# Altium PCB beta0303initial.PcbDoc (part 2 of 2)
Units mm, origin at the board's own origin, x right, y up, seen from the top; angles counter-clockwise.
Board outline 100 x 100 mm, 2 copper layers (Top Layer, Bottom Layer); 188 components, 107 nets, 516 pads, 164 vias.
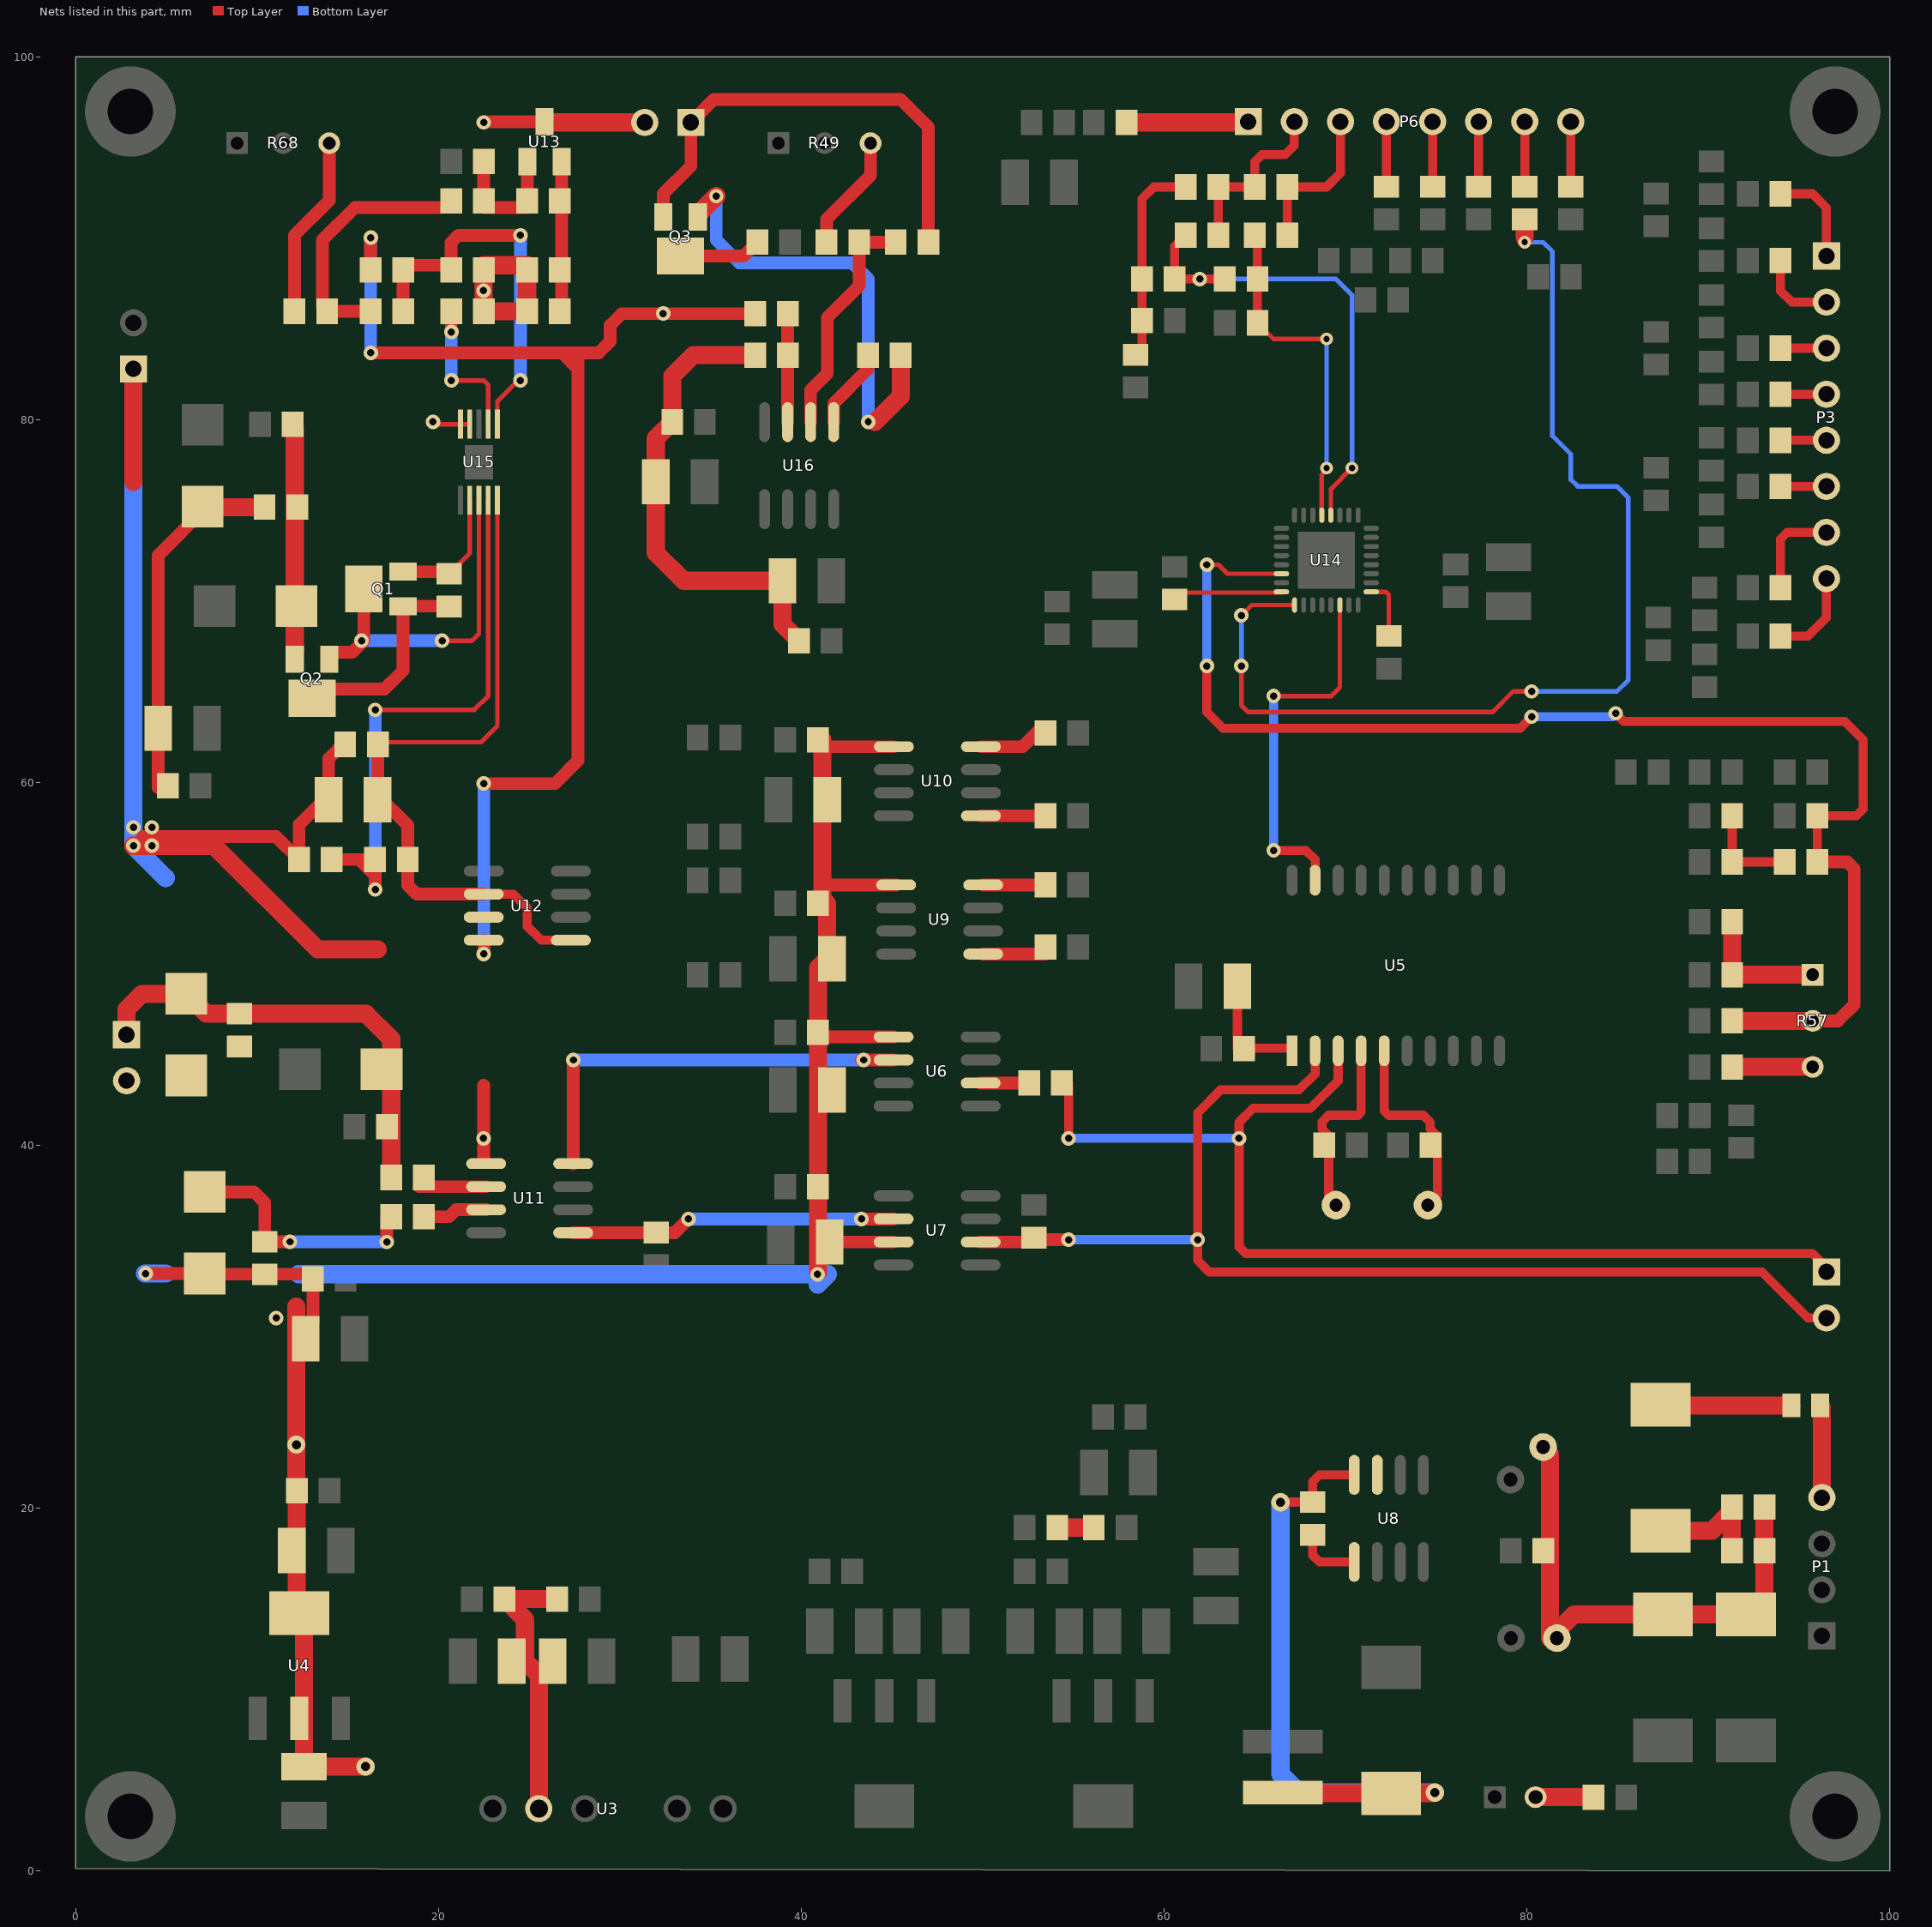
[diagram p2: the nets of this part, all layers, seen from the top]

## Via types
v1: diameter 0.8, hole 0.4, Top Layer to Bottom Layer, 103 vias
v2: diameter 0.7, hole 0.35, Top Layer to Bottom Layer, 22 vias
v3: diameter 1, hole 0.5, Top Layer to Bottom Layer, 16 vias
v4: diameter 0.6, hole 0.3, Top Layer to Bottom Layer, 9 vias
v5: diameter 0.5, hole 0.3, Top Layer to Bottom Layer, 9 vias
v6: diameter 0.3, hole 0.2, Top Layer to Bottom Layer, 5 vias

## Nets (pads, with @x,y where several pads share a name; then routed paths per layer and width w, separated by ;. In a path a pad name is that pad's centre, name@x,y a point inside that pad or via, vN(x,y) a via of type N, cw(c..) or ccw(c..) an arc to the next point about the centre after c; other vN are vias at no path point) (continued)
Iret: C7.2 C12.2 C17.1 C18.2 C19.2 C20.2 C21.1 C25.2 C26.2 C27.2 C28.2 C29.2 C30.2 C31.2 C32.2 C33.2 C34.2 C47.2 C48.1 C49.2 C50.2 C51.2 C60.1 C61.1 C62.2 C64.1 C65.2 C77.1 D8.1 D10.1 P5.1 P7.2 R16.1 R31.2 R33.2 R38.2 R63.1 U3.5 U4.2 U4.4 U6.5 U7.3 U9.5 U10.5 U11.5 U12.7 U13.3 U15.9 U15.10 | length 268.4
  Top Layer w0.254: v1@19.685,79.756 U15.10@21.209,79.756 U15.9@21.717,79.756
  Top Layer w0.7: 3.683,57.023 11.038,57.023 R38.2@12.308,55.753 12.308,57.68 13.937,59.309 13.937,61.319 C48.1@14.848,62.23 ; v1(3.846,32.929) D8.1@7.112,32.929 7.148,32.893 13.07,32.893 C28.2@13.07,32.639 13.07,30.248 C27.2@12.667,29.845 ; C61.1@4.539,59.701 C51.2@4.539,62.992 4.539,72.52 7.203,75.184 D10.1@7.239,75.22 ; 22.479,39.37 v1(22.479,40.386) 22.479,43.307 ; v1(22.49,96.393) 22.531,96.434 U13.3@25.842,96.434 ; C32.2@40.651,62.357 41.032,61.976 41.159,61.976 U10.5@45.098,61.976 ; C26.2@40.778,46.228 40.927,46.079 41.032,45.974 U6.5@45.087,45.974 ; C29.2@40.938,34.671 U7.3@45.087,34.671 ; 41.159,54.483 41.286,54.356 U9.5@45.225,54.356
  Top Layer w1: v1(3.175,56.515) 7.62,56.515 13.335,50.8 16.637,50.8 ; 3.175,76.581 P5.1@3.175,82.804 ; D10.1@7.203,75.184 C49.2@10.403,75.184 ; 12.156,31.112 v3(12.156,23.495) 12.156,20.98 C17.1@12.181,20.955 12.181,14.468 12.573,14.076 C7.2@12.573,5.748 v3(15.969,5.748) ; C77.1@22.49,88.265 R63.1@22.49,85.979 R33.2@24.881,85.979 R31.2@24.881,88.265 24.881,88.519 22.49,88.519 C77.1@22.619,88.39 ; U3.5@25.527,3.429 25.527,10.795 24.765,11.557 24.765,13.854 C19.2@23.633,14.986 C20.2@26.532,14.986 ; 26.416,96.393 P7.2@31.369,96.393 ; C65.2@37.454,83.566 34.036,83.566 32.882,82.412 C64.1@32.882,79.883 31.971,78.972 C62.2@31.971,76.581 31.971,72.677 33.528,71.12 C50.2@38.956,71.12 38.956,68.729 C60.1@39.867,67.818 ; v1@40.927,33.02 40.927,46.079 40.927,49.784 41.413,50.27 41.413,53.34 41.159,53.594 41.159,54.483 41.159,61.976 C32.2@41.159,62.357
  Bottom Layer w1: 3.175,77.978 v1(3.175,56.515) 4.953,54.737 ; v1@3.81,32.929 4.953,32.929 ; 12.286,32.893 41.463,32.893 40.894,32.324 v1(40.894,32.893)
  other v1: 11.049,30.48 4.191,56.515 3.175,57.531 4.191,57.531 19.685,79.883 22.479,87.122
IS: Q1.3 R36.2 U15.2 | length 7
  Top Layer w0.254: R36.2@20.574,71.512 21.717,72.655 U15.2@21.717,75.565
  Top Layer w0.7: Q1.3@18.034,71.623 R36.2@20.463,71.623
NetC2_1: C2.1 U5.4 Y1.1 | length 10.8
  Top Layer w0.5: Y1.1@69.469,36.703 69.077,37.095 69.077,40.513 68.707,40.883 68.707,41.291 69.072,41.656 70.695,41.656 70.866,41.827 U5.4@70.866,45.339
NetC5_2: C5.2 R2.2 U5.1 | length 6.9
  Top Layer w0.5: C5.2@64.041,49.276 64.041,45.361 67.034,45.361 U5.1@67.056,45.339
NetC6_1: C6.1 U5.5 Y1.2 | length 11.2
  Top Layer w0.5: U5.5@72.136,45.339 72.136,41.91 72.39,41.656 74.295,41.656 74.676,41.275 74.676,40.905 75.068,40.513 75.068,37.222 Y1.2@74.549,36.703
NetC11_1: C11.1 U8.1 | length 3.6
  Top Layer w0.5: C11.1@68.199,18.531 68.199,17.399 68.567,17.031 U8.1@70.485,17.031
NetC11_2: C11.2 D3.2 L1.1 U8.8 | length 37.3
  Top Layer w0.5: v3@66.432,20.331 C11.2@68.199,20.331 68.199,21.463 68.567,21.831 U8.8@70.485,21.831
  Top Layer w1: L1.1@66.594,4.272 D3.2@72.263,4.272 ; D3.2@72.517,4.272 v3@74.884,4.272
  Bottom Layer w1: v3(66.421,20.32) 66.421,5.334 67.437,4.318 v3(74.93,4.318)
NetC49_1: C49.1 D11.1 Q2.3 R34.2 | length 12.4
  Top Layer w1: Q2.3@12.07,67.183 R34.2@12.07,79.623
NetC52_1: C52.1 C53.2 R39.1 R48.2 | length 11.3
  Top Layer w0.5: R48.2@58.779,83.577 C53.2@58.779,87.757 58.779,92.18 59.436,92.837 R39.1@61.192,92.837
NetC63_2: C63.2 U14.1 | length 3.3
  Top Layer w0.254: U14.1@71.42,70.513 72.224,70.513 72.39,70.347 C63.2@72.39,68.083
NetC65_1: C65.1 R51.1 U16.3 | length 6
  Top Layer w0.7: U16.3@39.243,79.87 R51.1@39.243,85.841
NetC77_2: C77.2 R64.2 R65.2 U15.6 | length 21.9
  Top Layer w0.254: U15.6@23.241,79.765 23.241,81.026 v1@24.638,82.423
  Top Layer w0.7: R65.2@18.045,85.979 18.045,88.519 C77.2@20.69,88.519 ; C77.2@20.69,88.265 20.69,89.778 21.082,90.17 v1(24.511,90.17)
  Bottom Layer w0.7: v1(24.511,82.169) v1(24.511,90.17)
NetC79_2: C79.2 U14.24 | length 5.9
  Top Layer w0.254: C79.2@60.579,70.474 66.452,70.474 U14.24@66.47,70.492
NetD1_1: D1.1 R1.2 | length 1.6
  Top Layer w1: R1.2@54.113,18.923 D1.1@55.753,18.923
NetD2_1: D2.1 F1.2 | length 7.2
  Top Layer w1: D2.1@87.422,25.654 F1.2@94.577,25.654
NetD2_2: D2.2 R5.2 R6.2 | length 6.6
  Top Layer w1: D2.2@87.376,18.75 90.205,18.75 91.302,19.847 R6.2@91.302,17.653
NetD6_2: D6.2 R8.2 | length 3.2
  Top Layer w1: D6.2@80.482,4.064 R8.2@83.682,4.064
NetD7_1: D7.1 D9.2 P4.1 R13.2 R15.2 R17.2 | length 25
  Top Layer w1: P4.1@2.794,46.101 2.794,47.498 3.647,48.351 D9.2@6.096,48.351 7.192,47.255 R17.2@9.017,47.255 15.991,47.255 17.388,45.858 R13.2@17.388,38.227
NetD8_2: D8.2 D9.1 P4.2 R14.1 R16.2 R17.1 | length 14.9
  Top Layer w0.7: D8.2@6.35,38.191 D8.2@7.112,37.429 9.815,37.429 10.414,36.83 R16.2@10.414,34.682 v1(11.8,34.682) ; v1@17.134,34.682 R14.1@17.134,36.068
  Bottom Layer w0.7: v1(11.8,34.682) v1@17.145,34.682
  other v1: 17.145,34.671
NetF1_1: F1.1 P1.4 | length 5
  Top Layer w1: P1.4@96.266,20.574 F1.1@96.266,25.565
NetNTC1_1: NTC1.1 R52.2 R60.2 | length 5.4
  Top Layer w0.5: R60.2@91.324,58.166 R52.2@91.324,55.626 NTC1.1@94.223,55.626
NetP2_1: P2.1 R4.1 U5.3 | length 60.7
  Top Layer w0.5: v1@54.748,40.386 R4.1@54.748,43.434 ; U5.3@69.596,45.339 69.596,43.561 68.072,42.037 64.897,42.037 64.135,41.275 v1(64.135,40.386) 64.135,34.417 64.516,34.036 95.758,34.036 P2.1@96.774,33.02
  Bottom Layer w0.5: v1(54.737,40.386) v1(64.135,40.386)
NetP2_2: P2.2 R3.1 U5.2 U7.6 | length 65.2
  Top Layer w0.5: U5.2@68.326,45.339 68.326,43.938 67.441,43.053 63.119,43.053 61.849,41.783 v1(61.849,34.798) 61.849,33.655 62.484,33.02 92.964,33.02 95.504,30.48 P2.2@96.52,30.48
  Top Layer w0.7: U7.6@49.887,34.671 52.843,34.671 R3.1@52.97,34.798 ; R3.1@52.832,34.914 52.948,34.798 R3.1@52.97,34.798 ; R3.1@53.086,34.914 R3.1@52.97,34.798 ; v1(54.737,34.798) R3.1@52.97,34.798
  Bottom Layer w0.5: v1(54.737,34.798) v1(61.849,34.798)
NetP3_1: P3.1 R18.2 | length 5.5
  Top Layer w0.5: R18.2@93.991,92.456 95.758,92.456 96.52,91.694 P3.1@96.52,89.027
NetP3_2: P3.2 R19.2 | length 4.4
  Top Layer w0.5: R19.2@93.991,88.773 93.991,87.111 94.615,86.487 P3.2@96.52,86.487
NetP3_3: P3.3 R20.2 | length 2.5
  Top Layer w0.5: R20.2@93.991,83.947 P3.3@96.52,83.947
NetP3_4: P3.4 R21.2 | length 2.5
  Top Layer w0.5: R21.2@93.991,81.407 P3.4@96.52,81.407
NetP3_5: P3.5 R22.2 | length 2.5
  Top Layer w0.5: R22.2@93.991,78.867 P3.5@96.52,78.867
NetP3_6: P3.6 R23.2 | length 2.5
  Top Layer w0.5: R23.2@93.991,76.327 P3.6@96.52,76.327
NetP3_7: P3.7 R24.2 | length 5.4
  Top Layer w0.5: R24.2@93.991,70.739 93.991,73.417 94.361,73.787 P3.7@96.52,73.787
NetP3_8: P3.8 R25.2 | length 5.1
  Top Layer w0.5: R25.2@93.991,68.072 95.504,68.072 96.52,69.088 P3.8@96.52,71.247
NetP6_1: P6.1 R47.2 | length 6.2
  Top Layer w1: R47.2@58.431,96.393 P6.1@64.599,96.393
NetP6_2: P6.2 R35.2 R39.2 R40.2 | length 9.9
  Top Layer w0.5: R40.2@62.992,90.17 R39.2@62.992,92.837 R35.2@65.002,92.837 65.002,94.212 65.405,94.615 66.675,94.615 67.183,95.123 P6.2@67.183,96.437
NetP6_3: P6.3 R35.1 R41.2 | length 8.7
  Top Layer w0.5: R41.2@66.802,90.17 R35.1@66.802,92.837 68.961,92.837 69.723,93.599 P6.3@69.723,96.437
NetP6_4: P6.4 R42.2 | length 3.6
  Top Layer w0.5: R42.2@72.263,92.848 P6.4@72.263,96.437
NetP6_5: P6.5 R43.2 | length 3.6
  Top Layer w0.5: R43.2@74.803,92.848 P6.5@74.803,96.437
NetP6_6: P6.6 R44.2 | length 3.6
  Top Layer w0.5: R44.2@77.343,92.848 P6.6@77.343,96.437
NetP6_7: P6.7 R45.2 | length 3.6
  Top Layer w0.5: R45.2@79.883,92.848 P6.7@79.883,96.437
NetP6_8: P6.8 R46.2 | length 3.6
  Top Layer w0.5: R46.2@82.423,92.848 P6.8@82.423,96.437
NetP7_1: P7.1 Q3.3 R56.1 | length 26.4
  Top Layer w0.7: Q3.3@32.39,91.186 32.39,92.461 33.909,93.98 P7.1@33.909,96.393 35.179,97.663 45.466,97.663 47.001,96.128 R56.1@47.001,89.789
NetQ1_2: Q1.2 Q2.2 R36.1 | length 11.6
  Top Layer w0.7: Q2.2@13.081,64.77 13.462,65.151 17.018,65.151 18.034,66.167 Q1.2@18.034,69.723 20.563,69.723 R36.1@20.574,69.712
NetQ3_1: Q3.1 R62.2 | length 4.6
  Top Layer w0.7: Q3.1@33.34,89.027 36.819,89.027 R62.2@37.581,89.789
NetQ3_2: Q3.2 R61.1 | length 25.1
  Top Layer w1: Q3.2@34.29,91.186 34.29,91.313 v1(35.306,92.329) ; v1@44.069,79.883 45.477,81.291 R61.1@45.477,83.566
  Bottom Layer w0.7: v1(35.306,92.329) 35.306,89.916 36.576,88.646 42.799,88.646 43.688,87.757 v1@43.688,80.137
  other v1: 43.688,79.883
NetR4_2: R4.2 U6.2 | length 2.8
  Top Layer w0.7: U6.2@49.887,43.434 R4.2@52.694,43.434
NetR9_1: R9.1 U9.1 | length 3.4
  Top Layer w0.7: U9.1@50.025,50.546 R9.1@53.456,50.546
NetR10_1: R10.1 U9.4 | length 3.4
  Top Layer w0.7: U9.4@50.025,54.356 R10.1@53.456,54.356
NetR11_1: R11.1 U10.1 | length 3.6
  Top Layer w0.7: U10.1@49.898,58.166 R11.1@53.456,58.166
NetR12_1: R12.1 U10.4 | length 3.6
  Top Layer w0.7: U10.4@49.898,61.976 52.197,61.976 R12.1@53.086,62.865
NetR31_1: R31.1 R32.2 R33.1 U13.2 | length 8.3
  Top Layer w0.7: R33.1@26.681,85.979 26.792,86.09 U13.2@26.792,94.234
NetR49_3: R49.3 R50.2 | length 6.5
  Top Layer w0.7: R50.2@41.391,89.789 41.391,91.048 43.815,93.472 R49.3@43.815,95.25
NetR50_1: R50.1 R56.2 U16.2 | length 13
  Top Layer w0.7: U16.2@40.513,79.87 40.513,81.628 41.435,82.55 41.435,85.631 43.191,87.387 R50.1@43.191,89.789 R56.2@45.201,89.789
NetR54_2: R54.2 R55.2 R57.1 | length 7.4
  Top Layer w1: R55.2@91.324,52.324 R54.2@91.324,49.403 R57.1@95.758,49.403
NetR57_3: R57.3 R58.2 | length 4.4
  Top Layer w1: R58.2@91.324,44.323 R57.3@95.758,44.323
NetR61_2: R61.2 U16.1 | length 4.5
  Top Layer w0.7: U16.1@41.783,79.87 41.783,80.899 43.677,82.793 R61.2@43.677,83.566
NetR63_2: R63.2 U15.7 | length 8.1
  Top Layer w0.254: v1(20.701,82.169) 22.479,82.169 22.733,81.915 U15.7@22.733,79.756
  Top Layer w0.7: R63.2@20.69,85.979 v1(20.701,84.836)
  Bottom Layer w0.7: v1(20.701,82.169) v1(20.701,84.836)
NetR65_1: R65.1 R66.2 R67.1 | length 13.6
  Top Layer w0.7: R65.1@16.245,85.979 R67.1@13.854,85.979 13.589,86.244 13.589,89.905 15.378,91.694 20.055,91.694
NetR67_2: R67.2 R68.3 | length 10.1
  Top Layer w0.7: R67.2@12.054,85.979 12.054,90.17 13.97,92.086 R68.3@13.97,95.25
PSW: R45.1 U14.25 | length 59.7
  Top Layer w0.254: v1(64.262,66.421) 64.262,64.262 64.643,63.881 78.105,63.881 79.248,65.024 v1(80.264,65.024) ; v1(64.262,69.215) 64.835,69.788 U14.25@67.195,69.788
  Top Layer w1: v2@79.883,90.043 R45.1@79.883,91.048
  Bottom Layer w0.254: v1(64.262,66.421) v1(64.262,69.215) ; v2(79.883,89.789) 80.899,89.789 81.407,89.281 81.407,79.121 82.423,78.105 82.423,76.708 82.804,76.327 84.963,76.327 85.598,75.692 85.598,65.659 84.963,65.024 v1(80.264,65.024)
REFIN1+: C53.1 C54.1 R40.1 U14.12 | length 26.8
  Top Layer w0.254: U14.12@69.195,74.738 69.195,76.18 v2(70.358,77.343)
  Top Layer w0.5: R40.1@61.192,90.17 60.579,89.557 C53.1@60.579,87.757 v1(61.965,87.757) C54.1@63.351,87.757
  Bottom Layer w0.254: v1(61.965,87.757) 69.469,87.757 70.358,86.868 v2(70.358,77.343)
REFIN1-: C54.2 C55.1 R41.1 U14.13 | length 18.6
  Top Layer w0.254: C55.1@65.151,85.344 66.04,84.455 v2(68.961,84.455) ; U14.13@68.695,74.738 68.695,76.961 v2@69.019,77.285
  Top Layer w0.5: C55.1@65.151,85.344 R41.1@65.151,90.021
  Bottom Layer w0.254: v2(68.961,77.343) v2(68.961,84.455)
REFOUT: NTC1.2 R53.1 R57.2 R59.2 U14.22 | length 74.7
  Top Layer w0.254: v1@62.738,72.009 62.992,72.009 63.488,71.513 U14.22@66.47,71.513
  Top Layer w0.5: v1@62.357,66.167 62.357,63.881 63.246,62.992 79.629,62.992 v1(80.264,63.627) ; v1(84.9,63.817) 85.344,63.373 97.536,63.373 98.552,62.357 98.552,58.547 98.171,58.166 R59.2@96.023,58.166 NTC1.2@96.023,55.626
  Top Layer w0.7: R57.2@95.758,46.863 97.155,46.863 98.044,47.752 98.044,55.245 97.663,55.626 NTC1.2@96.023,55.626
  Top Layer w1: R53.1@91.324,46.863 R57.2@95.758,46.863
  Bottom Layer w0.5: v1@62.357,66.548 v1(62.357,72.009) ; v1(80.264,63.627) v1@84.709,63.627
  other v1: 62.357,66.421
RS485+: R13.1 U11.6 | length 3.7
  Top Layer w0.7: R13.1@18.934,37.719 U11.6@22.619,37.719
RS485-: R14.2 U11.7 | length 3.2
  Top Layer w0.7: R14.2@19.569,36.068 20.574,36.068 20.955,36.449 U11.7@22.619,36.449
RxD: R7.1 U7.2 U11.1 | length 18
  Top Layer w0.7: U11.1@27.419,35.179 33.02,35.179 v1(33.782,35.941) ; v1(43.318,35.941) U7.2@45.087,35.941
  Bottom Layer w0.7: v1(33.782,35.941) v1(43.318,35.941)
SCLK: U5.19 U14.30 | length 20.4
  Top Layer w0.254: v1(66.04,64.77) 69.215,64.77 69.695,65.25 U14.30@69.695,69.788
  Top Layer w0.5: v1(66.04,56.261) 67.818,56.261 68.326,55.753 U5.19@68.326,54.739
  Bottom Layer w0.5: v1(66.04,56.261) v1(66.04,64.77)
TxD: U6.6 U11.4 | length 23.4
  Top Layer w0.7: U11.4@27.419,38.989 v1@27.419,44.691 ; v1@43.307,44.704 U6.6@45.087,44.704
  Bottom Layer w0.7: v1(27.432,44.704) v1@43.307,44.704
  other v1: 43.434,44.704
VBIAS: R30.2 R32.1 R66.1 U13.1 | length 6.7
  Top Layer w0.7: R30.2@22.49,94.234 22.49,91.694 R32.1@24.881,91.694 ; R32.1@24.892,92.075 U13.1@24.892,93.853
VG: Q1.1 Q2.1 U15.3 | length 19
  Top Layer w0.254: v1(20.193,67.818) 21.844,67.818 22.225,68.199 U15.3@22.225,75.565
  Top Layer w0.7: Q2.1@13.97,67.183 15.24,67.183 15.875,67.818 Q1.1@15.875,70.673
  Bottom Layer w0.7: v1(15.748,67.818) v1(20.193,67.818)
VIN+: C4.1 C23.1 C24.1 D4.2 D5.2 R5.1 R6.1 U8.7 | length 28.4
  Top Layer w1: C4.1@80.899,23.368 81.28,22.987 81.28,12.827 82.596,14.143 D4.2@87.503,14.143 D5.2@92.075,14.143 93.102,15.17 R6.1@93.102,17.653 R5.1@93.102,20.066
VOUT: R51.2 R64.1 U12.8 | length 70
  Top Layer w0.7: R64.1@16.245,88.519 v1@16.245,90.032 ; v1(16.256,83.693) 26.797,83.693 ; v1(22.49,59.944) 26.416,59.944 27.686,61.214 27.686,82.804 ; v1(22.492,50.546) U12.8@22.492,51.308 ; 27.686,83.566 27.686,82.804 ; R51.2@37.454,85.852 30.099,85.852 29.464,85.217 29.464,84.328 28.829,83.693 26.797,83.693 ; 26.797,83.693 27.686,82.804
  Bottom Layer w0.7: v1(16.256,83.693) v1(16.256,90.043) ; v1(22.492,50.546) v1@22.492,59.942
  other v1: 32.385,85.852
VREGF: C47.1 C48.2 R37.1 U12.1 U12.6 U15.5 | length 38.8
  Top Layer w0.254: C48.2@16.637,62.219 22.341,62.219 23.241,63.119 U15.5@23.241,75.565
  Top Layer w0.5: U12.6@22.492,53.848 24.13,53.848 24.881,53.097 24.881,52.081 25.654,51.308 U12.1@27.292,51.308
  Top Layer w0.7: C48.2@16.648,62.23 16.637,62.219 16.637,59.309 18.299,57.647 R37.1@18.299,55.753 18.299,54.345 18.796,53.848 U12.6@22.492,53.848
VREGS: R37.2 R38.1 U15.4 | length 31.6
  Top Layer w0.254: v1(16.51,64.008) 21.971,64.008 22.733,64.77 U15.4@22.733,75.565
  Top Layer w0.7: R38.1@14.108,55.753 15.621,55.753 ; R37.2@16.499,55.753 15.621,55.753 ; v1(16.51,54.102) 16.51,54.864 15.621,55.753
  Bottom Layer w0.7: v1(16.51,54.102) v1(16.51,64.008)
pads on no net: P1.2 P1.3 U5.6 U5.7 U5.8 U5.9 U5.11 U6.1 U6.4 U6.7 U7.1 U7.4 U7.7 U8.2 U8.3 U8.5 U14.27 U14.31 U14.33 U15.8 U15.12 U16.5 U16.6 U16.7
copper on no net:
  other v5: 67.945,71.263 68.945,71.263 69.945,71.263 67.945,72.263 68.945,72.263 69.945,72.263 67.945,73.263 68.945,73.263 69.945,73.263
  other v6: 21.717,77.089 22.733,77.089 22.225,77.665 21.717,78.232 22.733,78.232

## Polygon pours and split planes (outlines as drawn)
AGND on Top Layer "Top Layer-No Net" (solid, pour order 103): 50.673,59.055 49.022,59.055 48.768,59.309 48.768,60.833 49.022,61.087 51.816,61.087 52.07,60.833 52.07,59.342 51.783,59.055
AGND on Top Layer "Top Layer-No Net" (solid, pour order 101): 51.181,51.435 49.022,51.435 48.768,51.689 48.768,53.213 49.022,53.467 51.816,53.467 52.07,53.213 52.07,51.722 51.783,51.435
VIN+ on Top Layer "Top Layer-No Net" (solid, pour order 39): 92.71,21.463 92.456,21.209 92.456,16.637 91.948,16.129 84.455,16.129 83.947,16.637 83.947,24.13 81.28,26.797 72.629,26.797 71.42,25.654 71.42,21.036 71.501,20.955 72.009,20.955 72.136,21.082 72.136,25.146 72.898,25.908 77.343,25.908 80.645,22.606 80.645,12.446 81.661,11.43 92.329,11.43 94.107,13.208 94.107,21.209 93.853,21.463
3.3VCC on Top Layer "Top Layer-No Net" (solid, pour order 91): 63.119,27.305 65.151,29.337 83.947,29.337 84.582,29.972 84.582,31.496 83.947,32.131 62.092,32.131 60.833,33.39 59.679,33.39 59.309,33.02 59.309,27.686 59.69,27.305
3.3AVDD on Top Layer "Top Layer-No Net" (solid, pour order 81): 57.531,68.961 52.705,68.961 51.943,69.723 51.943,73.914 52.578,74.549 55.626,74.549 56.388,75.311 56.388,97.028 55.626,97.79 54.356,97.79 53.848,97.282 53.848,88.773 53.34,88.265 50.292,88.265 49.53,87.503 49.53,66.167 50.419,65.278 58.674,65.278 59.182,65.786 59.182,67.437 59.817,68.072 59.817,68.326 59.193,68.95 58.928,68.95
3.3AVDD on Top Layer "Top Layer-No Net" (solid, pour order 89): 41.529,22.352 41.529,24.511 42.164,25.146 53.802,25.146 54.356,25.7 54.356,29.337 55.245,30.226 57.277,30.226 58.039,30.988 58.039,48.133 57.277,48.895 53.848,48.895 53.467,48.514 53.467,46.99 53.848,46.609 56.007,46.609 56.515,46.101 56.515,32.131 56.134,31.75 52.07,31.75 51.435,31.115 51.435,28.448 50.927,27.94 40.513,27.94 39.624,27.051 39.624,22.225 40.005,21.844
AGND on Top Layer "Top Layer-No Net" (solid, pour order 43): 45.212,20.193 44.958,19.939 44.958,15.494 44.831,15.367 44.704,15.367 44.577,15.494 44.577,22.606 42.291,22.606 42.291,15.24 42.926,14.605 42.926,12.238 43.942,11.222 43.942,6.488 42.534,5.08 42.534,2.805 43.18,2.159 46.228,2.159 46.863,2.794 46.863,4.826 45.212,6.477 45.212,11.43 45.72,11.938 46.482,11.938 46.736,12.192 46.736,19.939 46.482,20.193
3.3VCC on Top Layer "Top Layer-No Net" (solid, pour order 87): 57.15,25.781 57.15,26.67 57.785,27.305 60.198,27.305 60.833,27.94 60.833,46.355 61.595,47.117 62.23,47.752 62.23,48.26 62.23,52.959 62.611,53.34 66.548,53.34 67.056,53.848 67.056,54.737 66.675,55.118 61.214,55.118 60.579,54.483 60.579,51.181 58.928,49.53 58.928,29.718 58.547,29.337 55.88,29.337 55.372,28.829 55.372,24.638 54.864,24.13 56.642,24.13 57.15,24.638
AGND on Top Layer "Top Layer-No Net" (solid, pour order 85): 51.816,89.789 50.522,89.789 49.887,90.424 49.887,97.258 50.419,97.79 52.705,97.79 53.213,97.282 53.213,94.742 52.705,94.234 52.705,90.424 52.07,89.789
AGND on Top Layer "Top Layer-No Net" (solid, pour order 83): 54.229,69.342 53.34,69.342 52.959,69.723 52.959,73.406 53.34,73.787 60.96,73.787 61.341,73.406 61.341,71.877 61.087,71.623 59.05,71.623 58.674,71.247 58.674,70.358 58.293,69.977 55.499,69.977 54.864,69.342
5VDD on Top Layer "Top Layer-No Net" (solid, pour order 55): 17.526,7.112 18.161,7.747 18.161,18.796 17.653,19.304 16.256,19.304 15.748,19.812 15.748,23.622 15.113,24.257 14.224,24.257 13.589,23.622 13.589,16.51 13.97,16.129 16.002,16.129 16.521,15.61 16.521,10.171 16.002,9.652 14.605,9.652 14.224,9.271 14.224,7.355 14.467,7.112
Iret on Top Layer "Top Layer-No Net" (solid, pour order 63): 11.684,4.953 11.303,5.334 11.303,6.685 11.811,7.193 11.811,10.033 11.303,10.541 9.779,10.541 8.89,11.43 8.89,23.368 9.525,24.003 12.319,24.003 12.7,23.622 12.7,16.002 13.335,15.367 14.224,15.367 14.605,14.986 14.605,11.938 13.208,10.541 13.208,7.377 14.224,6.361 14.224,5.323 13.854,4.953
Iret on Top Layer "Top Layer-No Net" (solid, pour order 61): 25.781,2.159 24.892,2.159 24.511,2.54 24.511,4.699 23.241,5.969 23.241,15.875 23.495,16.129 26.797,16.129 27.051,15.875 27.051,5.334 26.416,4.699 26.416,2.54 26.035,2.159
-15V on Top Layer "Top Layer-No Net" (solid, pour order 59): 28.194,2.54 29.464,2.54 29.972,3.048 29.972,23.495 29.464,24.003 28.321,24.003 27.94,23.622 27.94,4.953 27.305,4.318 27.305,2.921 27.686,2.54
15V on Top Layer "Top Layer-No Net" (solid, pour order 57): 9.477,2.032 8.509,3 8.509,9.271 8.89,9.652 10.287,9.652 10.668,9.271 10.668,7.112 10.16,6.604 10.16,4.445 10.541,4.064 19.05,4.064 19.685,4.699 19.685,24.003 19.939,24.257 21.717,24.257 21.971,24.003 21.971,16.521 22.352,16.14 22.352,4.907 22.987,4.272 23.541,4.272 23.876,3.937 23.876,2.413 23.495,2.032
AGND on Top Layer "Top Layer-No Net" (solid, pour order 54): 33.02,2.54 33.655,2.54 34.29,3.175 34.29,12.573 33.909,12.954 32.512,12.954 32.131,12.573 32.131,3.175 32.766,2.54
5VIN on Top Layer "Top Layer-No Net" (solid, pour order 53): 35.56,2.667 37.592,2.667 38.227,3.302 38.227,12.319 37.592,12.954 35.56,12.954 35.433,12.827 35.433,4.191 35.052,3.81 35.052,2.794 35.179,2.667
3.3AVDD on Top Layer "Top Layer-No Net" (solid, pour order 51): 42.164,8.001 40.513,8.001 39.624,8.89 39.624,24.003 40.005,24.384 41.148,24.384 41.529,24.003 41.529,11.811 42.672,10.668 42.672,8.509 42.164,8.001
5VIN on Top Layer "Top Layer-No Net" (solid, pour order 49): 47.117,8.001 49.149,8.001 49.911,8.763 49.911,15.494 49.403,16.002 48.133,16.002 47.625,15.494 47.625,11.176 47.244,10.795 46.482,10.795 46.228,10.541 46.228,8.382 46.609,8.001
3.3VCC on Top Layer "Top Layer-No Net" (solid, pour order 47): 54.737,8.001 51.943,8.001 51.181,8.763 51.181,23.241 52.07,24.13 54.864,24.13 55.372,24.638 55.372,27.051 55.753,27.432 56.896,27.432 57.15,27.178 57.15,21.22 56.631,20.701 53.594,20.701 52.959,20.066 52.959,11.557 53.848,10.668 54.61,10.668 54.991,10.287 54.991,8.255
5VIN on Top Layer "Top Layer-No Net" (solid, pour order 41): 74.93,18.288 74.295,18.288 73.914,17.907 73.914,15.621 73.406,15.113 59.182,15.113 58.674,14.605 58.674,11.187 58.155,10.668 58.155,8.012 58.674,7.493 60.198,7.493 61.341,6.35 68.814,6.35 69.195,6.731 69.342,6.878 69.342,12.065 69.342,13.208 69.723,13.589 75.311,13.589 76.073,14.351 76.073,17.78 75.565,18.288
AGND on Top Layer "Top Layer-No Net" (solid, remove dead copper, pour order 40): 96.52,13.97 95.631,13.97 95.123,13.462 95.123,11.303 92.837,9.017 80.391,9.017 79.756,9.652 79.756,21.971 76.581,25.146 73.279,25.146 72.644,24.511 72.644,21.093 72.782,20.955 73.152,20.955 73.279,21.082 73.279,23.749 73.787,24.257 74.93,24.257 77.851,21.336 77.851,13.843 76.962,12.954 71.12,12.954 70.485,12.319 70.485,9.398 71.12,8.763 76.2,8.763 78.486,6.477 78.867,6.096 84.582,6.096 84.836,5.842 84.836,5.08 84.836,3.048 85.344,2.54 90.784,2.54 96.52,8.276 97.536,9.292 97.536,10.414 97.536,13.589 97.155,13.97
Iret on Top Layer "Top Layer-No Net" (solid, pour order 46): 12.7,22.987 12.7,26.924 13.462,27.686 13.589,27.813 13.589,31.623 13.589,33.02 13.081,33.528 9.525,33.528 8.636,34.417 3.302,34.417 2.413,33.528 2.413,24.892 3.429,23.876 7.112,23.876 8.89,22.098 12.065,22.098 12.7,22.733
NetD8_2 on Top Layer "Top Layer-No Net" (solid, pour order 56): 2.413,41.529 2.413,42.291 1.905,42.799 1.905,43.815 2.286,44.196 3.81,44.196 4.445,44.831 5.715,46.101 6.731,46.101 9.525,46.101 9.906,45.72 9.906,38.735 10.414,38.227 12.385,38.227 13.02,37.592 13.02,34.864 12.446,34.29 9.779,34.29 8.509,35.56 3.302,35.56 2.413,36.449
Iret on Top Layer "Top Layer-No Net" (solid, pour order 58): 1.905,57.785 1.905,73.787 2.286,74.168 4.826,74.168 5.08,74.422 5.08,74.93 4.826,75.184 2.54,75.184 2.032,75.692 2.032,83.439 2.413,83.82 4.191,83.82 4.572,83.439 4.572,77.597 5.207,76.962 10.668,76.962 11.049,76.581 11.049,73.533 10.668,73.152 6.096,73.152 5.334,72.39 5.334,58.293 5.842,57.785 10.668,57.785 11.303,58.42 11.303,62.102 12.065,62.864 14.86,62.864 15.494,62.23 15.494,61.087 14.859,60.452 14.859,58.039 14.097,57.277 13.589,57.277 13.081,56.769 13.081,53.467 13.589,52.959 22.479,52.959 22.733,52.705 22.733,52.451 22.479,52.197 19.939,52.197 19.431,51.689 19.431,49.657 19.812,49.276 23.241,49.276 23.749,48.768 23.749,39.37 23.368,38.989 21.844,38.989 21.463,39.37 21.463,47.373 20.949,47.879 18.288,47.879 17.018,49.149 10.668,49.149 8.255,51.562 3.048,51.562 2.032,52.578
5VDD on Top Layer "Top Layer-No Net" (solid, pour order 52): 29.972,33.147 34.417,33.147 35.433,34.163 35.433,63.5 35.814,63.881 39.37,63.881 39.751,63.5 39.751,31.623 38.481,30.353 30.099,30.353 29.21,31.242
15V on Top Layer "Top Layer-No Net" (solid, pour order 60): 8.382,58.928 6.858,58.928 6.35,59.436 6.35,71.882 6.858,72.39 9.017,72.39 9.525,71.882 9.525,59.436 9.017,58.928
Iret on Top Layer "Top Layer-No Net" (solid, pour order 68): 41.021,32.512 40.386,33.147 40.386,64.262 40.005,64.643 31.231,64.643 30.607,65.267 30.607,83.185 31.623,84.201 37.592,84.201 37.973,83.82 37.973,82.677 37.592,82.296 33.02,82.296 32.639,81.915 32.639,73.152 33.528,72.263 38.862,72.263 39.751,71.374 39.751,69.215 40.259,68.707 40.259,66.664 40.756,66.167 45.593,66.167 46.228,65.532 46.228,62.103 45.974,61.849 42.785,61.849 42.277,61.341 42.277,55.27 42.81,54.737 42.81,54.127 42.277,53.594 42.277,46.75 42.799,46.228 42.799,45.734 42.277,45.212 42.277,35.828 43.053,35.052 43.053,34.29 42.291,33.528 42.291,33.02 41.783,32.512
15V on Top Layer "Top Layer-No Net" (solid, pour order 69): 43.318,66.929 41.656,66.929 41.021,67.564 41.021,73.014 41.529,73.522 41.529,75.311 41.656,75.438 41.656,75.946 41.783,76.073 42.164,76.073 42.418,75.819 42.418,71.374 42.81,70.982 43.942,69.85 43.942,68.58 43.942,67.183 43.688,66.929
-15V on Top Layer "Top Layer-No Net" (solid, pour order 70): 35.687,73.279 34.544,73.279 34.036,73.787 34.036,80.391 34.671,81.026 37.846,81.026 38.227,80.645 38.227,78.994 37.973,78.74 36.576,78.74 36.195,78.359 36.195,73.787
15V on Top Layer "Top Layer-No Net" (solid, pour order 71): 14.235,74.803 13.716,75.322 13.716,81.015 13.335,81.396 9.663,81.396 9.017,82.042 9.017,92.964 10.668,94.615 10.668,97.536 11.303,98.171 20.447,98.171 21.209,97.409 21.209,93.98 20.701,93.472 16.764,93.472 16.129,94.107 16.129,96.266 15.367,97.028 12.827,97.028 12.192,96.393 12.192,93.345 10.541,91.694 10.541,84.328 11.557,83.312 14.859,83.312 15.875,82.296 15.875,75.311 15.367,74.803
VOUT on Top Layer "Top Layer-No Net" (solid, pour order 72): 23.241,59.309 27.559,59.309 28.575,60.325 28.575,82.677 29.718,83.82 31.115,85.217 32.004,85.217 37.338,85.217 37.846,85.725 37.846,86.487 37.592,86.741 29.591,86.741 28.829,85.979 28.829,84.582 28.321,84.074 15.875,84.074 15.748,83.947 15.748,83.439 15.875,83.312 26.53,83.312 27.292,82.55 27.292,61.709 26.162,60.579 22.087,60.579 21.833,60.325 21.833,59.574 22.098,59.309
Iret on Top Layer "Top Layer-No Net" (solid, pour order 73): 23.876,84.963 22.225,84.963 21.844,85.344 21.844,88.9 22.098,89.154 25.273,89.154 25.527,88.9 25.527,85.217 25.273,84.963
AGND on Top Layer "Top Layer-No Net" (solid, pour order 42): 61.468,19.939 60.96,19.431 60.96,17.272 60.833,17.145 60.691,17.145 60.564,17.272 60.579,25.654 60.198,26.035 58.166,26.035 57.785,25.654 57.785,23.749 58.039,23.495 58.039,20.574 57.277,19.812 57.277,18.034 56.642,17.399 53.848,17.399 53.456,17.007 53.456,15.124 53.975,14.605 53.975,12.192 54.356,11.811 55.499,11.811 56.007,11.303 56.007,6.466 54.494,4.953 54.494,2.529 54.864,2.159 58.42,2.159 58.801,2.54 58.801,5.08 57.404,6.477 57.404,15.494 57.912,16.002 64.389,16.002 64.897,16.51 64.897,19.42 64.378,19.939
5VDD on Top Layer "Top Layer-No Net" (solid, pour order 50): 17.78,27.178 35.306,27.178 39.37,31.242 39.497,62.738 39.243,62.992 37.846,62.992 37.454,62.6 37.454,35.803 35.433,33.782 25.273,33.782 24.638,34.417 24.638,35.179 24.257,35.56 21.717,35.56 21.209,35.052 21.209,33.909 20.447,33.147 16.764,33.147 16.002,33.909 16.002,41.656 15.621,42.037 14.859,42.037 14.097,42.799 14.097,45.72 13.589,46.228 11.303,46.228 10.541,45.466 10.541,39.751 11.303,38.989 13.335,38.989 14.478,37.846 14.478,25.7 13.589,24.811 13.589,19.939 16.521,17.007 16.521,10.171 17.526,9.166 17.526,7.112 18.161,7.747 18.161,20.574 16.51,22.225 16.51,25.908
AGND on Bottom Layer "Top Layer-No Net" (solid, pour order 99): 55.245,70.739 56.007,71.501 56.007,74.041 56.515,74.549 72.771,74.549 73.279,74.041 73.279,66.421 73.914,65.786 75.946,65.786 76.708,66.548 76.708,69.342 78.105,70.739 78.105,74.422 77.47,75.057 56.515,75.057 55.753,75.819 53.848,75.819 52.959,74.93 52.959,70.866 53.086,70.739
AGND on Bottom Layer "Top Layer-No Net" (solid, pour order 97): 55.88,87.503 55.88,88.265 56.896,89.281 69.977,89.281 70.612,89.916 70.612,91.948 69.977,92.583 57.023,92.583 55.753,93.853 55.245,93.853 54.61,93.218 54.61,87.376 54.991,86.995
3.3VCC on Bottom Layer "Top Layer-No Net" (solid, pour order 93): 84.836,31.115 83.185,31.115 82.042,32.258 82.042,50.038 81.28,50.8 78.867,50.8 77.851,51.816 77.851,67.945 78.232,68.326 78.74,68.326 79.121,67.945 79.121,52.578 79.502,52.197 83.312,52.197 84.455,51.054 84.455,37.719 85.344,36.83 87.249,36.83 88.011,36.068 88.011,32.258 86.868,31.115
AGND on Bottom Layer "Top Layer-No Net" (solid, pour order 74): 44.831,21.082 49.022,21.082 49.911,21.971 49.911,97.917 50.673,98.679 52.578,98.933 52.578,87.249 53.086,86.741 53.467,86.36 63.754,86.36 63.881,86.233 63.881,84.455 63.754,84.328 53.594,84.328 52.578,83.312 52.578,47.117 53.594,46.101 79.629,46.101 79.883,45.847 79.883,39.497 79.629,39.243 67.564,39.243 67.056,39.751 67.056,41.656 66.421,42.291 53.594,42.291 52.832,41.529 52.832,31.496 53.848,30.48 88.011,30.48 88.9,31.369 88.9,40.005 89.535,40.64 90.043,40.64 90.932,41.529 90.932,50.927 90.297,51.562 85.725,51.562 84.836,52.451 84.836,61.087 85.217,61.468 88.519,61.468 89.154,62.103 89.154,86.233 88.646,86.741 82.804,86.741 82.169,87.376 82.169,92.583 83.312,93.726 91.948,93.726 93.091,92.583 93.091,62.103 93.726,61.468 97.155,61.468 97.536,61.087 97.536,52.606 97,52.07 94.742,52.07 93.599,50.927 93.599,30.734 92.075,28.829 61.341,28.829 60.833,28.321 60.833,27.94 61.341,27.432 61.341,20.701 59.944,19.304 44.323,19.304 43.815,19.812 44.831,20.828
3.3AVDD on Bottom Layer "Top Layer-No Net" (solid, pour order 79): 56.515,46.863 54.864,46.863 54.229,47.498 54.229,64.897 53.594,65.532 53.594,66.421 54.229,67.056 56.261,67.056 56.896,66.421 56.896,47.498 56.261,46.863
Iret on Bottom Layer "Top Layer-No Net" (solid, pour order 65): 25.654,2.413 24.765,2.413 24.511,2.667 24.511,4.445 24.003,4.953 15.748,4.953 15.367,5.334 15.367,7.366 15.748,7.747 26.162,7.747 26.543,7.366 26.543,2.667 26.289,2.413
5VIN on Bottom Layer "Top Layer-No Net" (solid, pour order 44): 62.611,16.129 35.941,16.129 34.925,15.113 34.925,2.794 35.306,2.413 78.359,2.413 78.867,2.921 78.867,4.826 78.74,4.953 77.597,4.953 77.216,4.572 77.216,3.429 76.708,2.921 64.516,2.921 63.754,3.683 63.754,15.494 63.119,16.129
AGND on Bottom Layer "Top Layer-No Net" (solid, pour order 45): 77.978,23.876 53.975,23.876 51.054,20.955 35.179,20.955 32.131,17.907 32.131,3.175 32.766,2.54 33.528,2.54 34.163,3.175 34.163,16.51 35.052,17.399 60.706,17.399 65.151,21.844 77.216,21.844 78.486,20.574 79.248,20.574 80.01,21.336 80.01,21.844
AGND on Bottom Layer "Top Layer-No Net" (solid, pour order 48): 77.978,23.876 74.422,27.432 72.644,27.432 58.42,27.432 57.785,26.797 57.785,24.638 57.023,23.876 57.658,23.241 57.658,22.86 76.962,22.86 77.978,23.876
15V on Bottom Layer "Top Layer-No Net" (solid, pour order 64): 22.86,22.987 19.177,22.987 17.78,24.384 16.002,26.162 14.478,26.162 9.271,26.162 7.62,27.813 7.62,59.944 8.128,60.452 9.398,60.452 9.779,60.071 9.779,29.21 10.287,28.702 12.827,28.702 14.859,30.734 43.815,30.734 44.704,31.623 44.704,63.627 43.561,64.77 41.148,64.77 40.386,65.532 40.386,70.104 40.894,70.612 41.148,70.866 41.275,70.866 43.688,70.866 44.704,71.882 44.704,89.662 43.688,90.678 39.751,90.678 39.116,91.313 39.116,92.456 39.878,93.218 45.085,93.218 45.847,92.456 45.847,30.226 44.45,28.829 27.559,28.829 26.162,27.432 26.162,25.019 24.13,22.987
Iret on Bottom Layer "Top Layer-No Net" (solid, pour order 66): 11.049,29.845 11.938,29.845 13.716,31.623 42.545,31.623 43.307,32.385 43.307,33.528 42.545,34.29 20.066,34.29 19.177,33.401 11.557,33.401 10.668,32.512 10.668,30.226 11.049,29.845
-15V on Bottom Layer "Top Layer-No Net" (solid, pour order 67): 29.083,23.114 32.004,23.114 34.036,25.146 34.671,25.781 40.64,25.781 47.244,25.781 48.26,26.797 48.26,98.298 47.371,99.187 8.89,99.187 7.874,98.171 7.874,94.742 8.255,94.361 9.525,94.361 9.906,94.742 9.906,97.79 10.414,98.298 36.449,98.298 37.211,97.536 37.211,95.377 38.1,94.488 39.116,94.488 39.751,95.123 39.751,96.393 40.259,96.901 46.355,96.901 46.863,96.393 46.863,28.829 45.72,27.686 29.337,27.686 27.813,26.162 27.813,23.876 28.575,23.114
Iret on Bottom Layer "Top Layer-No Net" (solid, pour order 62): 3.175,31.369 2.413,32.131 2.413,39.243 4.064,40.894 4.064,48.768 2.413,50.419 2.413,78.994 4.318,80.899 21.336,80.899 22.098,81.661 22.098,96.901 22.352,97.155 22.733,97.155 22.987,96.901 22.987,80.01 22.098,79.121 6.858,79.121 5.969,78.232 5.969,32.639 4.699,31.369
AGND on Bottom Layer "Top Layer-No Net" (solid, pour order 75): 49.911,97.917 51.181,99.187 52.197,99.187 54.737,99.187 55.88,98.044 55.88,87.503 56.896,86.487 63.627,86.487 63.881,86.233 63.881,84.328 63.627,84.074 53.34,84.074 52.578,83.312 51.562,84.328 49.911,84.328
AGND on Bottom Layer "Top Layer-No Net" (solid, pour order 76): 52.578,69.723 52.578,70.231 53.086,70.739 55.245,70.739 55.753,71.247 55.753,73.914 55.245,74.422 55.753,73.914 55.753,83.439 56.388,84.074 55.245,85.217 55.245,85.598 52.451,85.598 51.054,84.201 52.197,83.058 52.197,69.85

## Silkscreen, mask and mechanical layers (free items; w line width, h text height)
Top Overlay:
  circle w0.254: c3,3 r4
  circle w0.254: c97,3 r4
  lines w0.127: 19.304,81.661 19.304,87.503 ; 27.813,84.074 27.813,92.329 28.575,91.567 ; 36.703,66.421 37.338,67.056 37.338,66.421 37.338,57.277 ; 36.83,56.261 37.338,56.769 37.338,48.514 ; 50.419,97 50.419,87.503 50.927,88.011 ; 61.965,88.646 61.965,80.391 62.6,81.026 ; 88.365,72.036 88.773,71.628 88.773,79.883 ; 88.403,97.039 88.773,97.409 88.773,88.138 ; 91.059,71.882 91.059,63.754 91.313,64.008 91.567,64.262 ; 93.726,23.749 94.361,24.384 94.361,23.622 94.361,16.129 ; 96.647,65.913 97.282,66.548 97.282,54.102
  lines w0.254: 2,2 2,98 98,98 98,2 2,2
  text "RS485" at 3.937,37.465 h1 r90
  text "TO 323/485" at 94.234,29.718 h1 r90
  text "5VVDDON" at 15.24,25.4 h1
  text "+-15VON" at 25.908,25.4 h1
  text "5VON" at 69.977,25.4 h1
  text "3.3VON" at 46.99,25.146 h1
  text "电源部分" at 2.794,24.511 h3
  text "5VIN指示灯" at 81.788,0.635 h1.5
Mechanical 1:
  lines w0.254: 0,0 100,0 100,100 0,100 0,0

## Dimensions
0,0 to 100,0 on Mechanical 1
0,0 to 0,100 on Mechanical 1

## Text inside footprints (layer, text, board x,y; h text height)
D6: Top Overlay "+" at 77.597,4.699 h1.52